# Altium PCB PCB1.PcbDoc
Units mm, origin at the board's own origin, x right, y up, seen from the top; angles counter-clockwise.
Board outline 48.89 x 46.99 mm, 2 copper layers (Top Layer, Bottom Layer), stack 1.57 mm thick; 21 components, 16 nets, 60 pads, 7 vias.
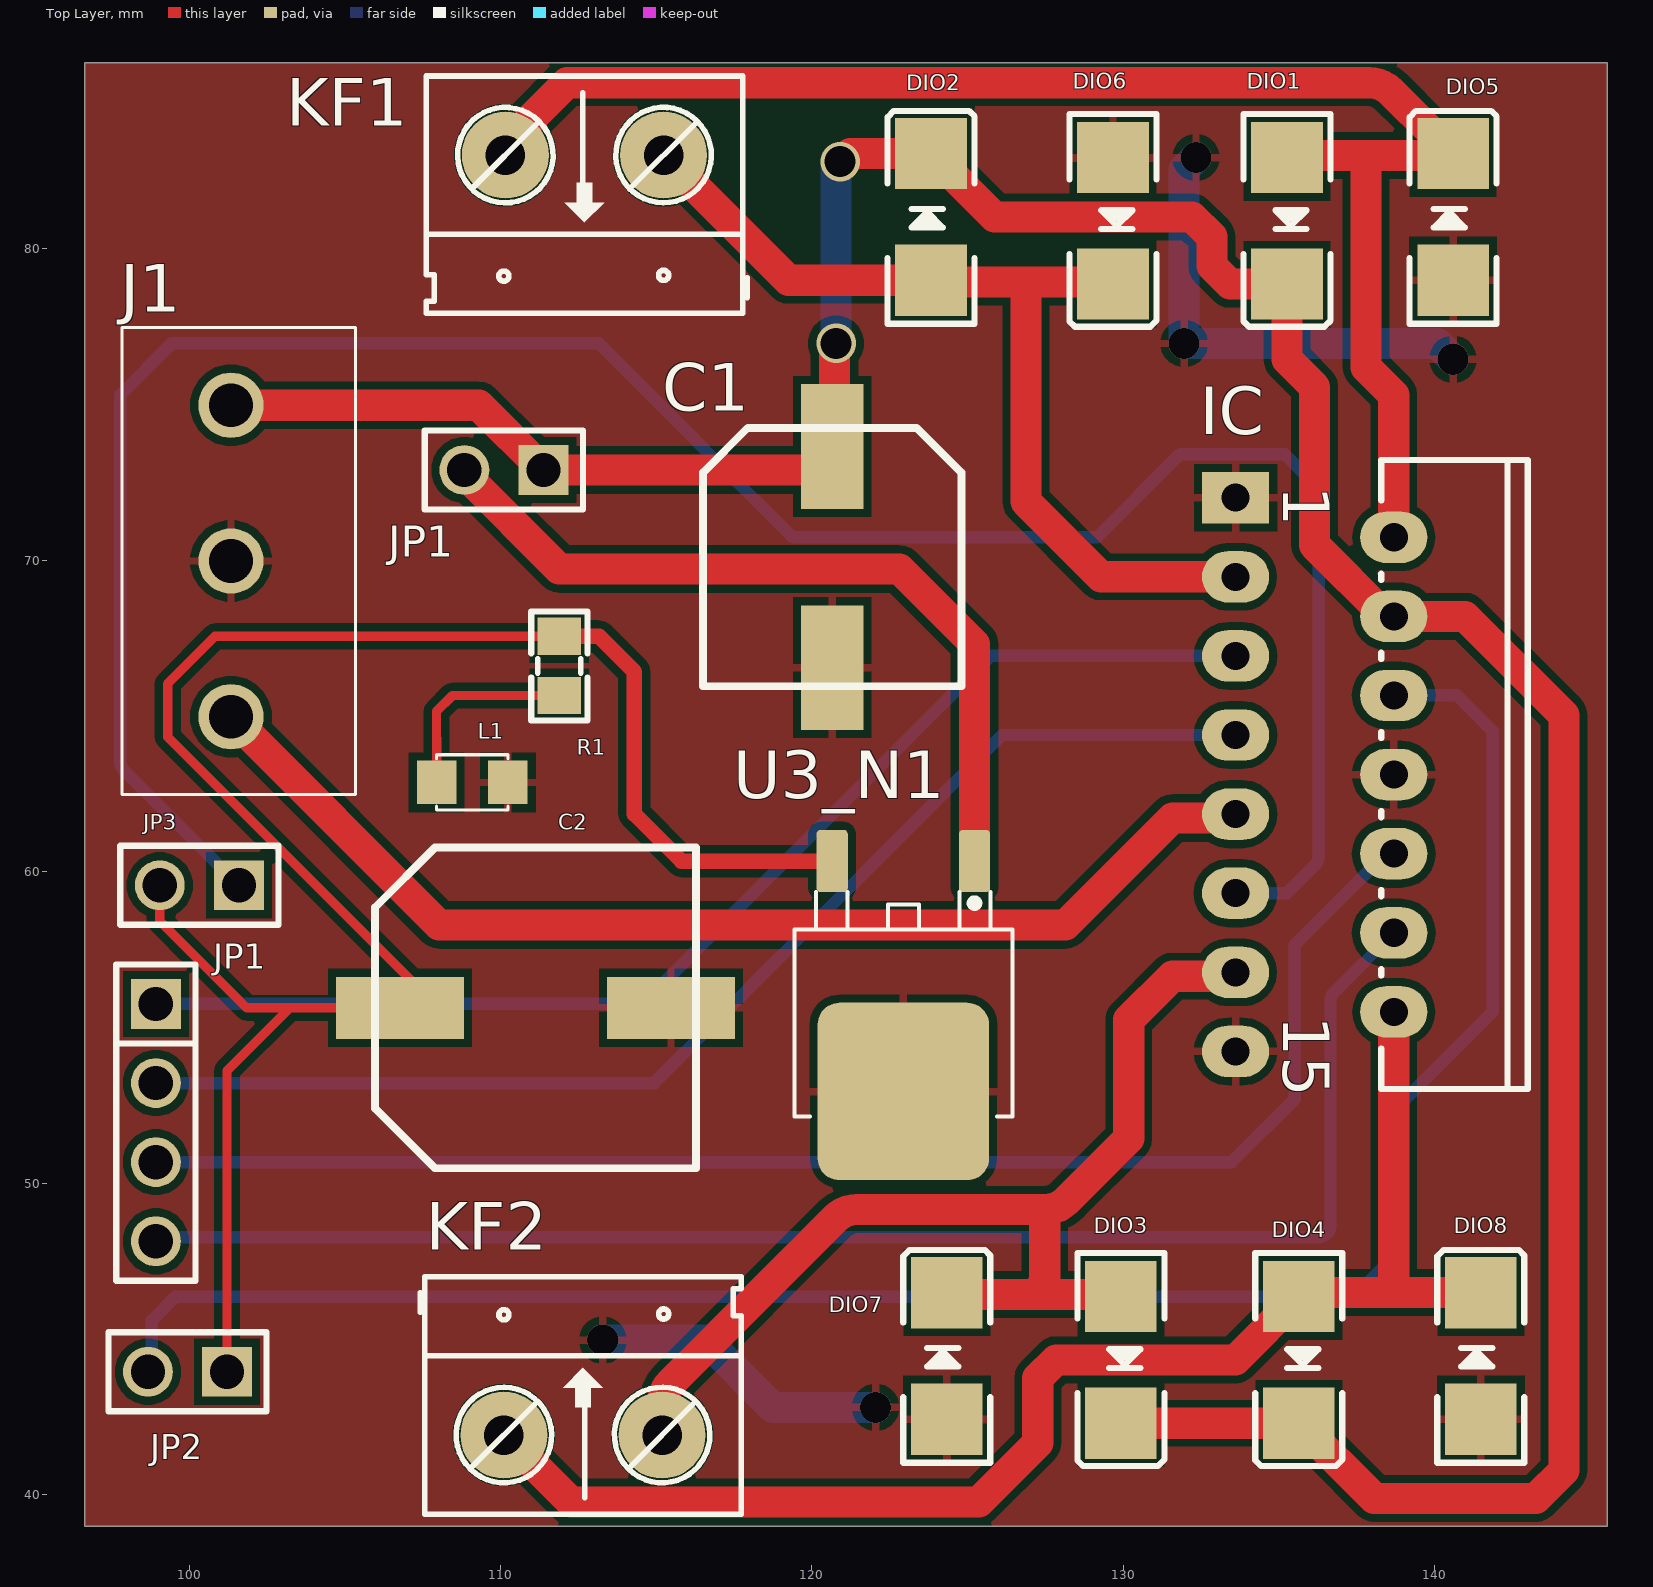
[diagram p0: Top Layer view]
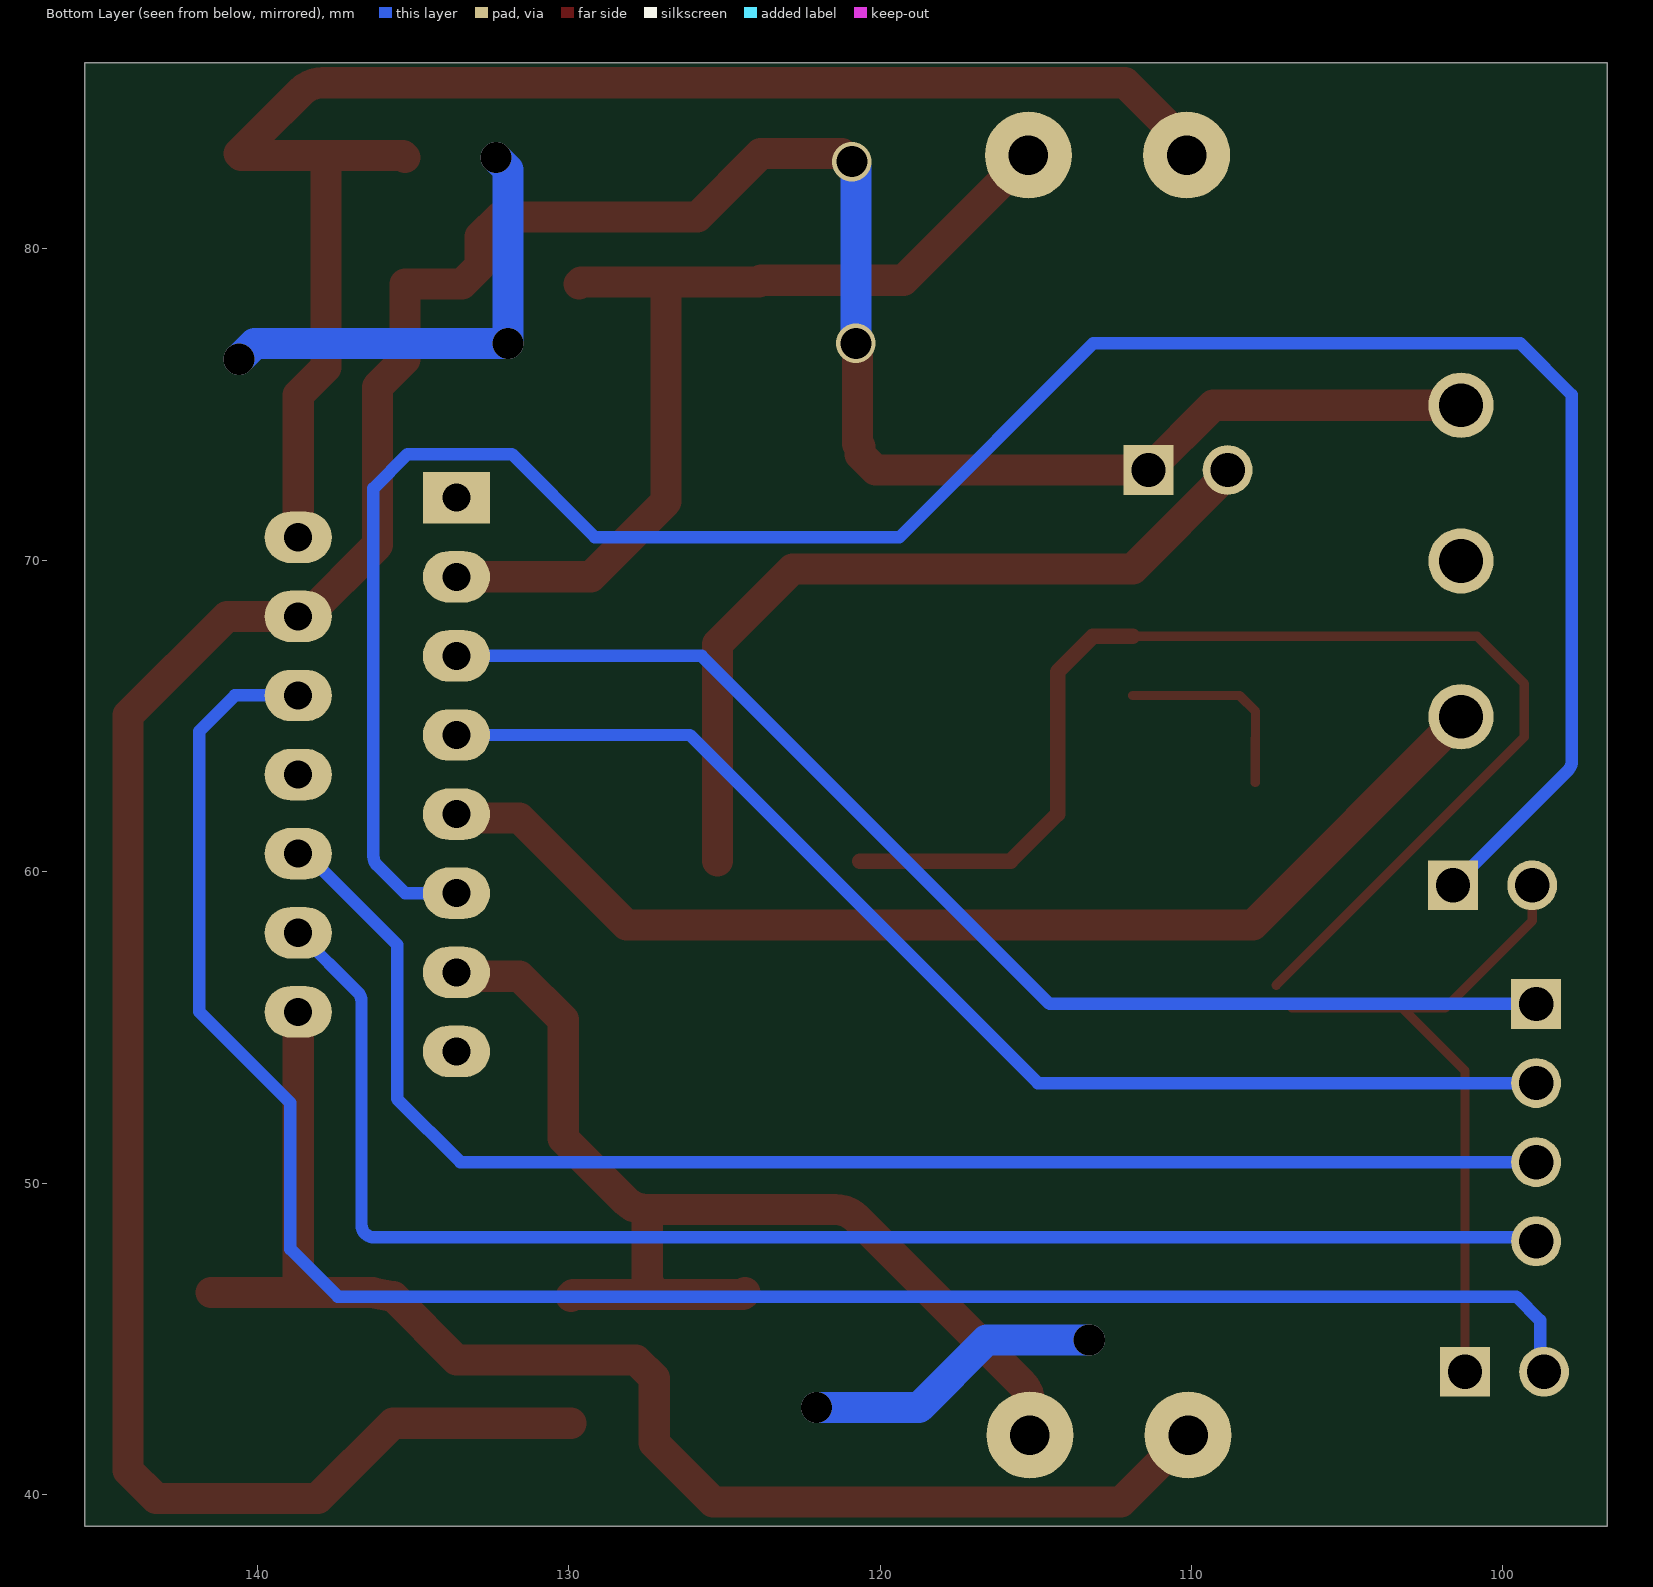
[diagram p1: Bottom Layer view, seen from below]
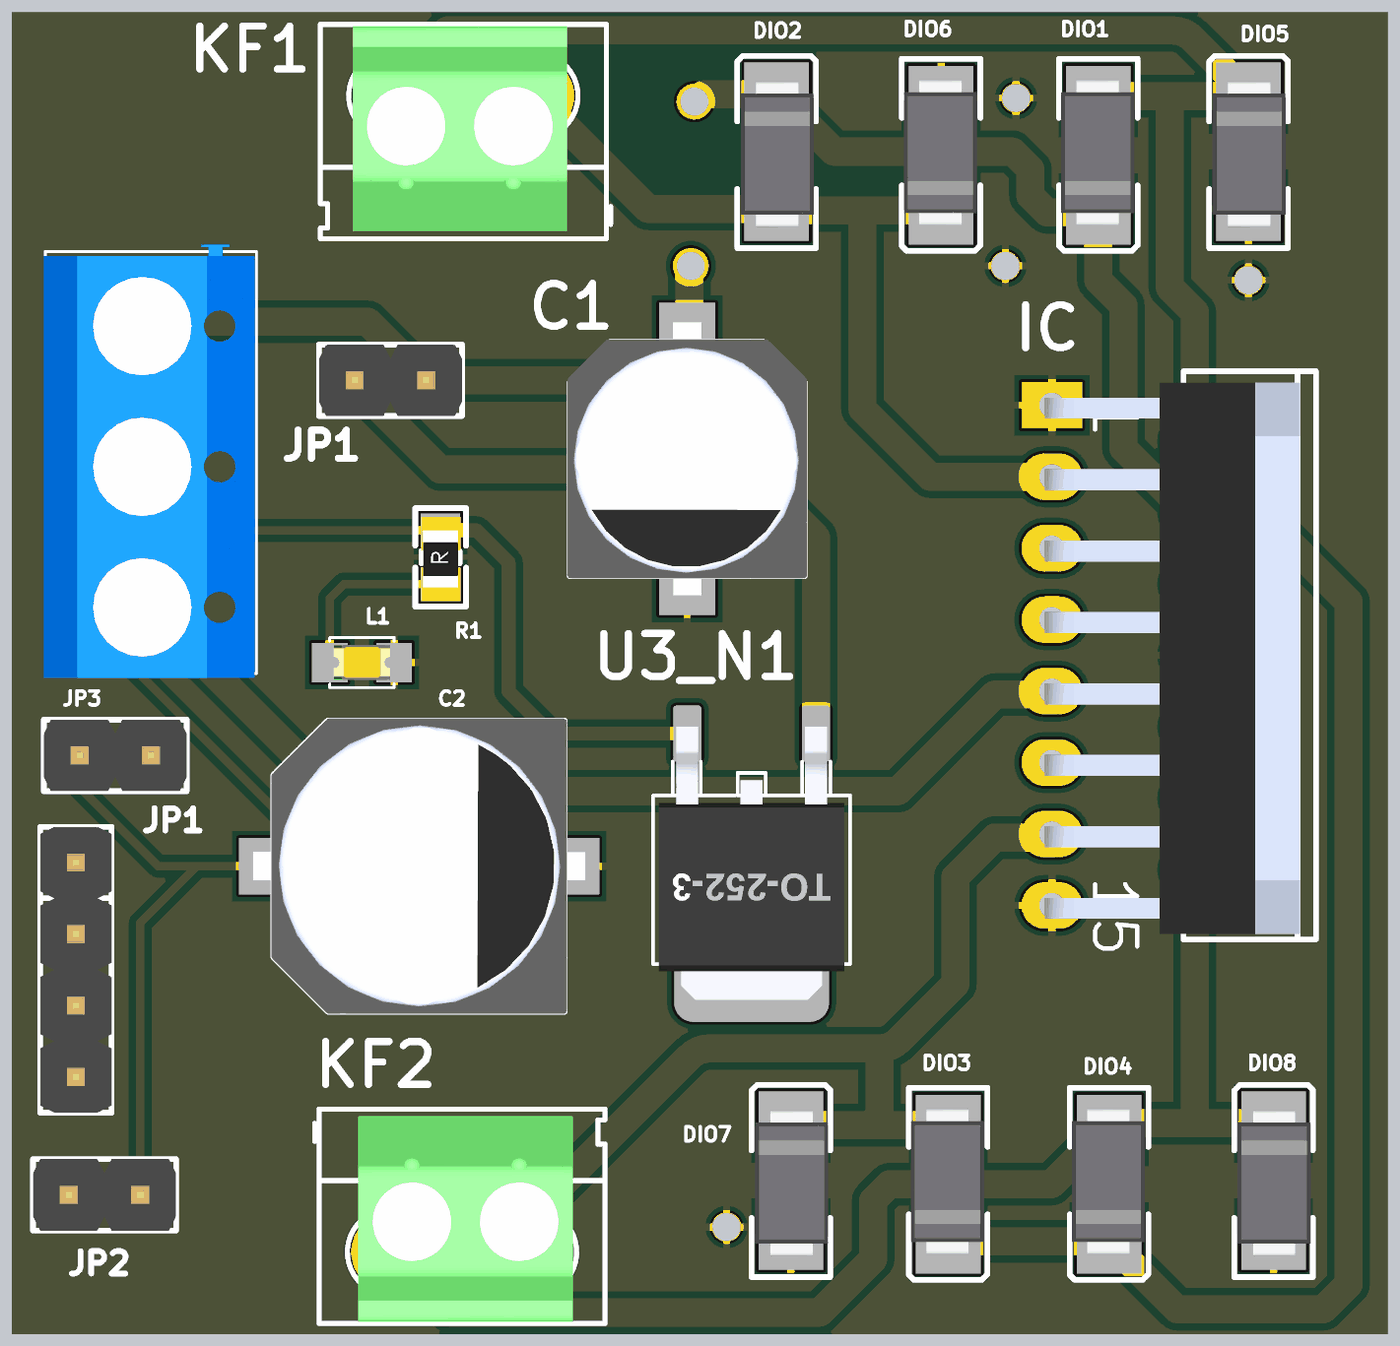
[diagram p2: 3D render of the assembled board from above, using the file's embedded part models]

## Layer stack, top to bottom
Top Solder: solder mask 0.01, Solder Resist, Dk 3.5
Top Layer: signal copper 0.035
Dielectric 1: dielectric 1.5, FR-4, Dk 4.8
Bottom Layer: signal copper 0.035
Bottom Solder: solder mask 0.01, Solder Resist, Dk 3.5

## Board outline
96.647,38.989 145.542,38.989 145.542,85.979 96.647,85.979

## Design rules (kind name [scope] priority, off if disabled: settings)
Clearance [All] p1: gap=0.254 ignorepadtopadclearanceinfootprint=FALSE
MinimumSolderMaskSliver [All] p1: minsoldermaskwidth=0.15
PolygonConnect [All] p1: connectstyle=Relief reliefconductorwidth=0.254 reliefentries=4 polygonreliefangle="90 Angle" airgapwidth=0.254
RoutingVias [All] p1: holewidth=0.3 width=0.6 viastyle="Through Hole" minholewidth=0.2 minwidth=0.4 maxholewidth=0.4 maxwidth=1
SilkToSolderMaskClearance [IsPad] p1: minsilkscreentomaskgap=0.08 clearancetoexposedcopper=TRUE
SolderMaskExpansion [All] p1: expansion=0.102 istentingtop=FALSE
SupplyNets "Schematic Supply Nets" [InNet('GND')] p1: voltage=0.000
Width [All] p1: maxlimit=1 minlimit=0.2 preferedwidth=0.4
28 further rules are at their usual default settings.

## Classes and differential pairs
component class Sheet1: C1 C2 DIO1 DIO2 DIO3 DIO5 DIO6 DIO7 IC J1 JP1 JP2 JP3 KF1 KF2 L1 R1 U3_N1

## Components (designator, comment, footprint, x,y, rotation, side; value= is the part's Value field where it differs from the comment)
C1 "220uF" "tu nhom 8 (f)" 120.65,70.104 r270 top
C2 "220uF" "tu nhom 10 (g)" 111.125,55.626 r0 top
DIO1 "Diode SMD" DIO-SMD-106 135.255,80.899 r90 top value=1N5007
DIO2 "Diode SMD" DIO-SMD-106 123.825,81.026 r270 top value=1N5007
DIO3 "Diode SMD" DIO-SMD-106 129.921,44.323 r90 top value=1N5007
DIO4 "Diode SMD" DIO-SMD-106 135.636,44.323 r90 top value=1N5007
DIO5 "Diode SMD" DIO-SMD-106 140.589,81.026 r270 top value=1N5007
DIO6 "Diode SMD" DIO-SMD-106 129.667,80.899 r90 top value=1N5007
DIO7 "Diode SMD" DIO-SMD-106 124.333,44.45 r270 top value=1N5007
DIO8 "Diode SMD" DIO-SMD-106 141.478,44.45 r270 top value=1N5007
IC "L298" DIP15SL2 136.144,63.119 r270 top
J1 "KF301-3P" KF3013P 101.346,74.977 r270 top
JP1 "" "JP 1x2 DT" 111.379,72.898 r180 top
JP1 "JP 1x4 2.54" "JP 1x4 DT" 98.933,55.753 r270 top
JP2 "ENA" "JP 1x2 DT" 101.219,43.942 r180 top
JP3 "ENB" "JP 1x2 DT" 101.6,59.563 r180 top
KF1 "CON 2 KF301" "Con 2 KF301 5.08" 115.236,83.011 r180 top
KF2 "CON 2 KF301" "Con 2 KF301 5.08" 110.109,41.91 r0 top
L1 "LED 0805" LED-0805-Orange 107.95,62.865 r0 top
R1 "1k" "tro smd 0805" 111.826,66.605 r90 top
U3_N1 "78M05 SMD TO252" TO252 122.936,56.642 r180 top

## Footprints (in the part's own frame and the unit in brackets; to place one, negate y for a bottom-side part, rotate by r counter-clockwise, add the part's x,y. Pads: shape width x height; smd on the part's side, far side on the other; paste and mask are expansions set on the pad)
"Con 2 KF301 5.08" [mil]
  round 110 hole 50: 1(0,0) 2(200,0)
  silkscreen extent -106,-100 300,200, body extent -45,-97 255,190, height 335
DIO-SMD-106 [mil]
  rect 90x90.55 smd: 1(80,0) 2(-80,0)
  silkscreen extent -134,-55 135,55, body extent -99,-50 106,52, height 95
DIP15SL2 [mil] "TO, Thru-Hole, Vertical, Heatsink Mounted; 15 Bent Staggered Leads; Pitch 1.27 mm"
  rect 65x85 hole 35.43: 1(-350,-100)
  oval 65x85 hole 35.43: 2(-300,100) 3(-250,-100) 4(-200,100) 5(-150,-100) 6(-100,100) 7(-50,-100) 8(0,100) 9(50,-100) 10(100,100) 11(150,-100) 12(200,100) 13(250,-100) 14(300,100) 15(350,-100)
  silkscreen extent -398,84 398,269, body extent -382,-110 390,247, height 895
"JP 1x2 DT" [mm] "2 pins, 1 row, straight, gold plating"
  rect 1.6x1.6 hole 1.1: 1(0,0)
  round 1.6 hole 1.1: 2(2.54,0)
  silkscreen extent -1.27,-1.27 3.81,1.27, body extent -1.27,-1.27 3.81,1.27, height 8.54
"JP 1x4 DT" [mm] "4 pins, 1 row, straight, gold plating"
  rect 1.6x1.6 hole 1.1: 1(0,0)
  round 1.6 hole 1.1: 2(2.54,0) 3(5.08,0) 4(7.62,0)
  silkscreen extent -1.27,-1.27 8.89,1.27, body extent -1.27,-1.27 8.89,1.27, height 8.54
KF3013P [mm]
  round 2.1 hole 1.4: 1(0,0) 2(5,0) 3(10,0)
  silkscreen extent -2.5,-3.5 12.5,4, body extent -2.75,-3.56 12.65,3.94, height 5
LED-0805-Orange [mil]
  rect 50x55 smd: 1(0,0) 2(90,0)
  silkscreen extent 0,-35 90,35, body extent 5,-25 85,25, height 43
TO252 [mm] "TO252"
  round 0.5 on Mech15: 0(0,0)
  rrect25% 1x2 smd: 1(-2.285,-3.7) 3(2.285,-3.7)
  rrect25% 5.5x5.7 smd: 2(0,3.7)
  silkscreen extent -3.5,-2.7 3.5,4.5, body extent -3.3,-3.95 3.3,5.76, height 2.31
"tro smd 0805" [mm]
  rect 1.2x1.4 smd: 1(-0.946,-0.061) 2(0.954,-0.061)
  silkscreen extent -1.75,-0.97 1.75,0.84, body extent -1.56,-0.76 1.44,0.64, height 0.53
"tu nhom 8 (f)" [mm]
  rect 4x2 smd: 1(-3.55,0) 2(3.55,0)
  silkscreen extent -4.15,-4.15 4.15,4.15, body extent -4.85,-4.25 4.85,4.25, height 10.5
"tu nhom 10 (g)" [mm]
  rect 4.1x2 smd: 1(-4.35,0) 2(4.35,0)
  silkscreen extent -5.15,-5.15 5.15,5.15, body extent -5.9,-5.25 5.9,5.25, height 10.5

## Part data
C1: library part "Tu Nhom 220uF 25V", "Dán", Chung_Loai=Dán, Don_Vi=Con, Ma_Hang=MH002221, So_Chan=2, Ten_Linh_Kien="Tụ Nhôm 220uF 25V"
C2: library part "Tu Nhom 220uF 50V", "Dán", Chung_Loai=Dán, Don_Vi=Con, Ma_Hang=MH002228, So_Chan=2, Ten_Linh_Kien="Tụ Nhôm 220uF 50V 10x10.2MM"
DIO1 DIO2 DIO3 DIO4 DIO5 DIO6 DIO7 DIO8: "Default Diode", Code - JEDEC=DO-214-AB, Published=8-Jun-2000, Publisher="Altium Limited", Revision="July-2002: Re-released for DXP Platform."
IC: "Dual Full-H Driver", ComponentLink1Description="Manufacturer Link", ComponentLink1URL=http://www.ti.com/, DatasheetVersion=Jun-1990, Note="The tab is elec is connected to GND pin", PackageDescription="TO, Thru-Hole, Vertical, Heatsink Mounted; 15 Bent Staggered Leads; Pitch 1.27 mm", PackageReference=KV015, Published=15-May-2002, Publisher="Altium Limited"
J1: "Terminal Block 5mm Pitch 3 Poles", Manufacturer_Name="Handson Technology", Datasheet Link=http://www.handsontec.com/dataspecs/terminal%20block-5mm.pdf, Geometry.Height=10mm, Manufacturer_Part_Number=KF301-3P
JP1 JP2 JP3: library part "JP 1x2 2.54 Duc Thang", "Cắm", Chung_Loai=Cắm, Don_Vi=Con, Ma_Hang=MH000903, Ten_Linh_Kien="Jump Đơn Đực 2.54MM 1x40P Thẳng 11MM"
JP1: library part "JP 1x4 2.54 Duc Thang", "Cắm", Chung_Loai=Cắm, Don_Vi=Con, Ma_Hang=MH000903, Ten_Linh_Kien="Jump Đơn Đực 2.54MM 1x40P Thẳng 11MM"
KF1 KF2: "Cắm", Chung_Loai=Cắm, Don_Vi=Con, Ma_Hang=MH000987, Ten_Linh_Kien="CON 2 KF301-2P 5.08MM Xanh Dương"
L1: library part "LED 0805 Cam", "Dán", Chung_Loai=Dán, Don_Vi=Con, Ma_Hang=MH002328, Ten_Linh_Kien="LED 0805 Màu Cam ( Orange)"
R1: library part "Tro 0805 5% 1k", "Dán", Chung_Loai=Dán, Don_Vi=Con, Ma_Hang=MH005234, So_Chan=2, Ten_Linh_Kien="Trở 0805 5% 1k"
U3_N1: "Dán", Chung_Loai=Dán, Don_Vi=Con, Ma_Hang=MH001917, Ten_Linh_Kien="78M05 TO252"

## Via types
v1: diameter 1, hole 1, Top Layer to Bottom Layer, 5 vias
v2: diameter 1.27, hole 1, Top Layer to Bottom Layer, 2 vias

## Nets (pads, with @x,y where several pads share a name; then routed paths per layer and width w, separated by ;. In a path a pad name is that pad's centre, name@x,y a point inside that pad or via, vN(x,y) a via of type N, cw(c..) or ccw(c..) an arc to the next point about the centre after c; other vN are vias at no path point)
GND: C1.2 C2.2 DIO5.1 DIO6.1 DIO7.1 DIO8.1 IC.1 IC.8 IC.15 J1.2 L1.2 U3_N1.2 | length 24.6
  Bottom Layer w1: v1(113.284,44.958) 116.586,44.958 118.745,42.799 v1(122.047,42.799) ; v1(132.334,82.931) 131.953,82.55 v1(131.953,76.962) 140.081,76.962 v1(140.589,76.454)
"Net JP1_1": IC.5 JP1.1@98.933,55.753 | length 39.6
  Top Layer w1: IC.5@133.35,66.802 133.477,66.929 IC.5
  Bottom Layer w0.4: JP1.1@98.933,55.753 114.554,55.753 125.73,66.929 IC.5
"Net JP1_2": IC.7 JP1.2@98.933,53.213 | length 39.6
  Bottom Layer w0.4: JP1.2@98.933,53.213 114.935,53.213 126.111,64.389 IC.7 IC.7@133.858,64.389
"Net JP1_3": IC.10 JP1.3 | length 46.8
  Bottom Layer w0.4: JP1.3 133.477,50.673 135.509,52.705 135.509,57.658 138.43,60.579 IC.10
"Net JP1_4": IC.12 JP1.4 | length 48.2
  Bottom Layer w0.4: JP1.4 99.06,48.26 136.252,48.26 ccw(c136.252,48.66) 136.652,48.66 136.652,55.841 cw(c137.052,55.841) 136.769,56.124 IC.12
NetC1_1: C1.1 DIO1.2 DIO2.2 DIO3.2 DIO4.2 IC.4 J1.1 JP1.1@111.379,72.898 | length 105.5
  Top Layer w1: J1.1 109.3,74.977 111.379,72.898 120.15,72.898 120.65,73.398 C1.1 120.725,73.729 120.725,76.91 v2(120.777,76.962) ; v2(120.904,82.804) 120.977,82.804 121.231,83.058 DIO2.2 123.832,83.058 125.864,81.026 132.207,81.026 132.842,80.391 132.842,79.453 133.428,78.867 DIO1.2 135.255,76.454 136.144,75.565 136.144,70.485 138.43,68.199 IC.4 140.97,68.199 144.145,65.024 144.145,40.767 143.256,39.878 138.056,39.878 135.643,42.291 DIO4.2 DIO3.2
  Bottom Layer w1: v2(120.777,76.962) 120.777,82.604 120.904,82.731 v2(120.904,82.804)
NetC2_1: C2.1 JP2.1 JP3.2 R1.2 U3_N1.3 | length 63.2
  Top Layer w0.3: JP3.2 99.06,58.42 101.854,55.626 103.234,55.626 ; JP2.1 101.219,53.611 103.234,55.626 ; C2.1 103.234,55.626 ; C2.1@107.283,56.356 99.314,64.325 99.314,66.04 100.833,67.559 R1.2
  Top Layer w0.5: R1.2 113.162,67.559 114.3,66.421 114.3,61.849 115.807,60.342 U3_N1.3
NetDIO1_1: DIO1.1 DIO5.2 IC.2 KF1.2 | length 50.6
  Top Layer w1: KF1.2@109.982,83.185 112.133,85.336 137.89,85.336 cw(c137.89,84.336) 138.596,85.044 139.939,83.701 DIO5.2 140.525,82.995 137.795,82.995 ; DIO1.1 135.319,82.995 137.707,82.995 137.795,82.907 137.795,76.2 138.684,75.311 IC.2 IC.2@138.43,70.739
NetDIO2_1: DIO2.1 DIO6.2 IC.3 KF1.1 | length 31.5
  Top Layer w1: KF1.1@115.349,83.185 115.062,83.185 119.253,78.994 DIO2.1 123.888,78.93 126.746,78.93 ; DIO6.2 129.603,78.93 126.746,78.93 ; IC.3 129.286,69.469 126.873,71.882 126.873,78.803 126.746,78.93
NetDIO3_1: DIO3.1 DIO7.2 IC.13 KF2.2 | length 36.3
  Top Layer w1: KF2.2 115.189,42.893 cw(c116.189,42.893) 115.481,43.599 120.738,48.856 cw(c121.445,48.149) 121.445,49.149 127.475,49.149 ; DIO7.2 124.396,46.419 127.127,46.419 ; DIO3.1 129.857,46.419 127.127,46.419 ; IC.13@133.858,56.769 IC.13 133.479,56.644 131.574,56.644 130.175,55.245 130.175,51.435 128.182,49.442 cw(c127.475,50.149) 127.475,49.149 ; 127.127,46.419 127.475,46.766 127.475,49.149
NetDIO4_1: DIO4.1 DIO8.2 IC.14 KF2.1 | length 45.6
  Top Layer w1: KF2.1 112.26,39.759 125.357,39.759 127.254,41.656 127.254,43.739 127.84,44.325 133.599,44.325 135.629,46.355 DIO4.1 136.286,46.482 138.882,46.482 ; IC.14@138.43,55.499 IC.14 138.684,46.68 138.882,46.482 ; DIO8.2 138.882,46.482
NetIC_6: IC.6 JP2.2 | length 64.3
  Bottom Layer w0.4: JP2.2 98.806,44.069 98.806,45.593 99.568,46.355 137.414,46.355 138.938,47.879 138.938,52.578 141.859,55.499 141.859,64.516 140.716,65.659 IC.6
NetIC_9: IC.9 J1.3 | length 36.7
  Top Layer w1: J1.3 108.03,58.293 128.143,58.293 131.574,61.724 133.479,61.724 IC.9
  Bottom Layer w0.4: J1.3@101.346,64.977 ccw(c101.525,65.335) J1.3@101.525,64.935
NetIC_11: IC.11 JP3.1 | length 75.7
  Bottom Layer w0.4: JP3.1 101,60.163 97.907,63.256 cw(c98.19,63.539) 97.79,63.539 97.79,75.311 99.441,76.962 113.157,76.962 119.38,70.739 129.159,70.739 131.826,73.406 135.176,73.406 136.271,72.311 136.271,70.69 136.271,60.491 cw(c135.871,60.491) 136.154,60.208 135.255,59.309 IC.11
NetJP1_2: JP1.2@108.839,72.898 U3_N1.1 | length 25.7
  Top Layer w1: JP1.2@108.839,72.898 108.839,72.772 111.888,69.723 122.809,69.723 125.221,67.311 U3_N1.1
NetL1_1: L1.1 R1.1 | length 6.4
  Top Layer w0.3: L1.1 107.95,64.28 107.947,64.282 107.947,65.148 108.458,65.659 R1.1
pads on no net: U3_N1.0

## Polygon pours and split planes (outlines as drawn)
GND on Top Layer "GND_L01_P000" (solid, remove dead copper, pour order 0): 96.647,85.979 145.542,85.979 145.542,38.989 96.647,38.989

## Text inside footprints (layer, text, board x,y; h text height)
IC: Top Overlay "1" at 135.128,72.39 h1.5 r270; Top Overlay "15" at 135.128,55.372 h1.5 r270